# Allegro board Fb_Connect1_SYNC_Life-3.brd
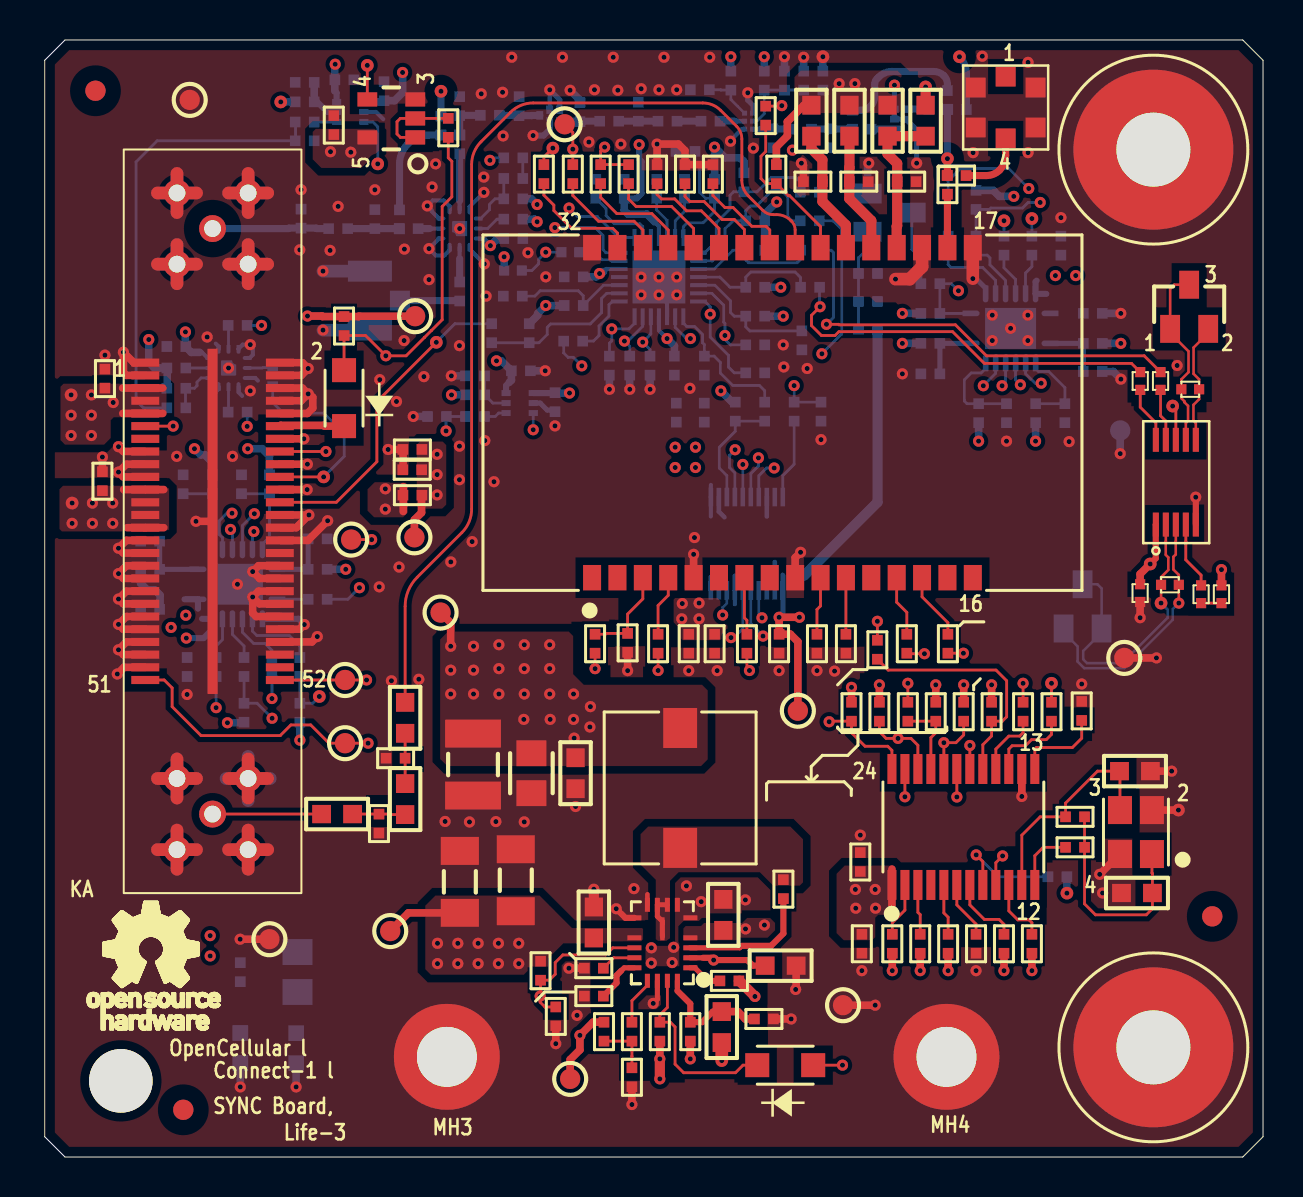
[diagram p0: board, top side]
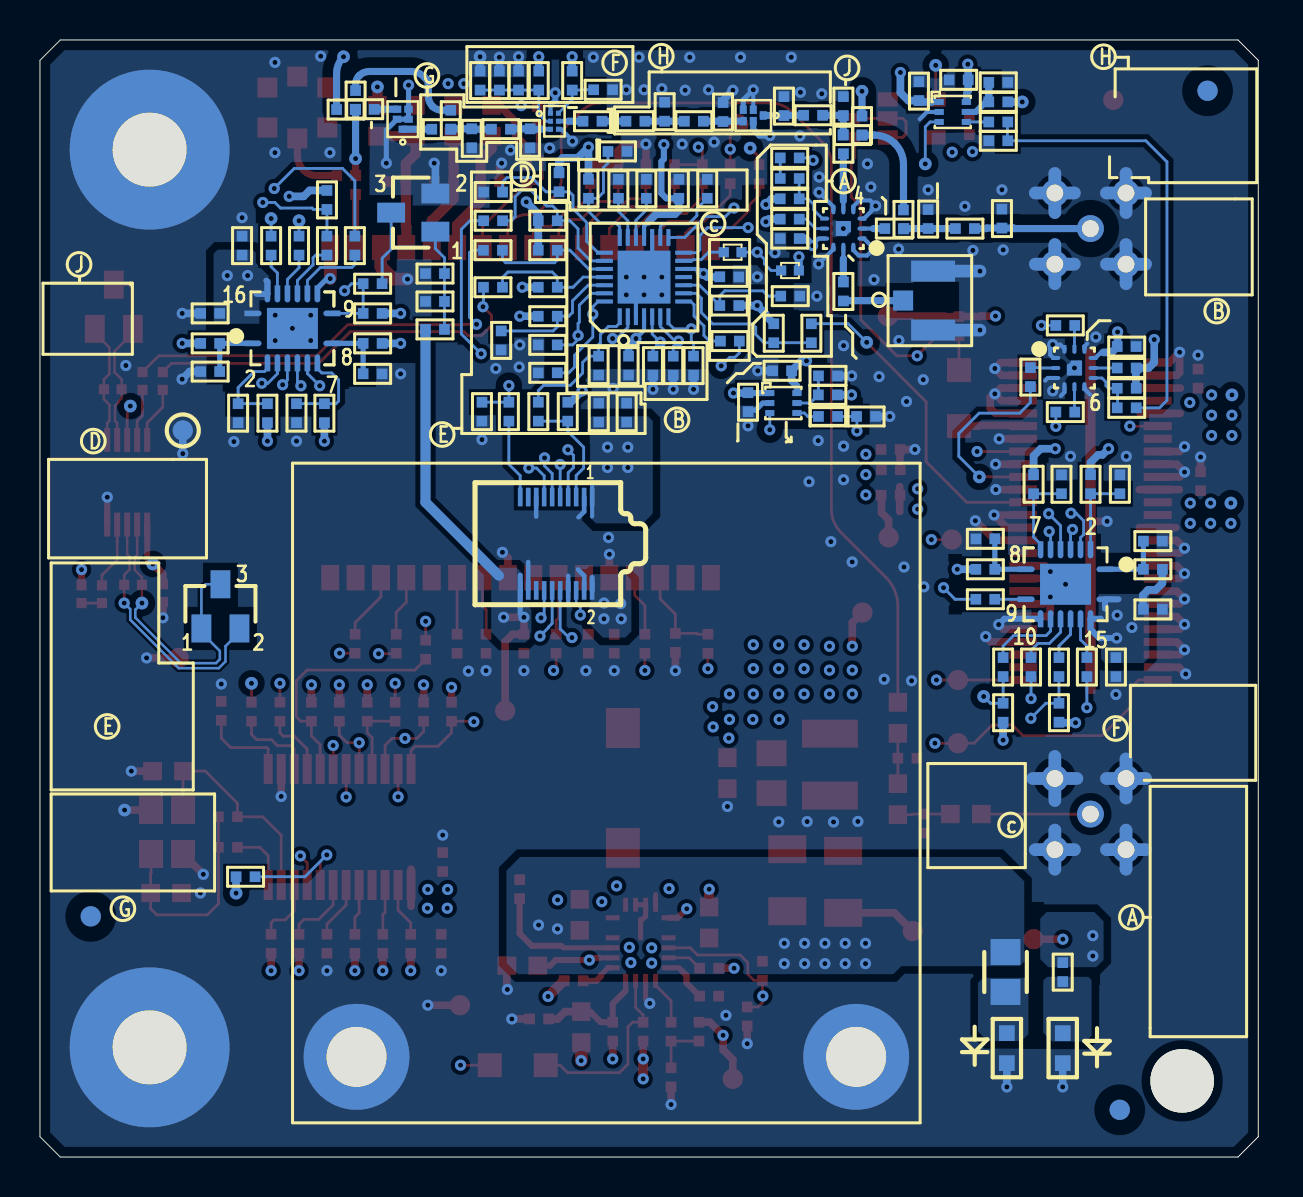
[diagram p1: board, bottom side, seen from below]

Outline 60.96 x 55.88 mm; copper layers: TOP, GND, SIG1, SIG2, PWR, BOTTOM. Coordinates in mm from the lower left corner of the outline.
Outline path: 0,54.86 0,1.02 1.02,0 59.94,0 60.96,1.02 60.96,54.86 59.94,55.88 1.02,55.88 0,54.86

## Design rules (mm)
net group ADT7481_D1_N: nets ADT7481_D1_N ADT7481_D1_P
net group ADT7481_D2_N: nets ADT7481_D2_N ADT7481_D2_P
net group ADT_THERM_N: nets ADT_THERM_N N16399039
net group TEMP_ALERT: nets TEMP_ALERT TEMP_ALERT_R
net group TIVA_SYNCCONN_I2C7_SCLK: nets N16399647 TIVA_SYNCCONN_I2C7_SCLK
net group TIVA_SYNCCONN_I2C7_SDA: nets N16399661 TIVA_SYNCCONN_I2C7_SDA
net group PWR: nets LT8640_INT_VCC N00529 N10833 N10845 N467382
net group RF: nets GPS_IRIDUM_ANT GPS_LNA_IN GPS_LNA_OUT N16236513 N16236561 N16236568 N16236755 N16239300 N16242234 N16242265 N16252104 N16252502 N16252658 N16252725 N16253717 N16281078 N16326389 N16509904 RF_IN_EXT_C RF_IN_IRIDUM RF_IN_LTE RF_IN_SPDT

## Placement (name value [footprint] x y rotation side)
C1L1  1UF  [CC0402]  40.89 10.67 270 top
C1L2  22pF  [CC0603]  54.55 19.3 0 top
C1L3  22pF  [CC0603]  54.65 13.21 180 top
C1L4  1UF  [CC0402]  32.22 25.68 270 top
C1L5  1UF  [CC0402]  31.61 37.24 90 bottom
C2  0.1uF  [CC0402]  38.44 48.79 180 top
C2L11  0.1UF  [SMC0402A]  54.81 27.77 180 top
C2L12  1000PF  [SMC0402A]  55.86 28.63 90 top
C2L13  1000PF  [SMC0402A]  56.87 38.41 90 top
C3  0.1uF  [CC0402]  40.73 48.79 0 top
C4  0.1uF  [CC0402]  43.13 48.79 0 top
C4N1  10pF  [RC0402]  12.83 46.95 270 bottom
C4N2  10pF  [RC0402]  16.52 46.92 270 bottom
C5  0.1uF  [CC0402]  40.81 14.76 90 top
C8  0.1uF  [CC0402]  38.64 25.68 270 top
C9  0.1uF  [CC0402]  41.2 44.2 0 bottom
C10  0.1uF  [CC0402]  36.75 25.68 270 top
C11  0.1uF  [CC0402]  50.85 45.59 90 bottom
C12  0.1uF  [CC0402]  33.52 25.68 270 top
C13  0.1uF  [CC0402]  52.44 42.2 0 bottom
C14  100uF  [CC1210]  21.43 19.63 270 top
C15  4.7UF  [CC0805]  24.35 19.2 270 top
C16  1uF  [CC0603]  26.56 19.2 270 top
C17  0.1uF  [CC0402]  7.12 24.51 270 bottom
C18  0.1uF  [CC0402]  5.28 27.39 180 bottom
C19  0.1uF  [CC0402]  36.96 13.4 90 top
C20  10uF  [CC1206]  23.57 13.85 90 top
C21  10uF  [CC1206]  20.77 13.76 90 top
C22  1uF  [CC0603]  33.95 12.11 90 top
C23  1uF  [CC0603]  27.48 11.73 90 top
C24  1uF  [CC0603]  36.82 9.57 0 top
C25  0.1uF  [CC0402]  27.48 8.05 180 top
C26  10pF  [CC0402]  32.3 6.27 270 top
C27  0.1uF  [CC0402]  33 37.24 90 bottom
C1944  0.1uF  [CC0402]  14.47 51.62 90 top
C2609  33pF  [C0402]  23.45 45.95 0 bottom
C3505  22pF  [C0402]  17.56 19.95 180 top
C4461  0.1uF  [C0402]  2.89 33.81 90 top
C4462  33pF  [C0402]  31.16 51.82 0 bottom
C4477  0.1uF  [C0402]  37.97 53.85 90 bottom
C4478  1uF  [C0402]  37.01 53.85 90 bottom
C4479  33pF  [C0402]  38.94 53.85 90 bottom
C4480  33pF  [C0402]  32.78 53.39 180 bottom
C4481  33pF  [C0402]  45.17 48.64 90 top
C4482  0.1uF  [C0402]  3.01 38.94 90 top
C4495  0.1uF  [C0402]  25.53 37.76 270 bottom
C4496  0.1uF  [C0402]  23.83 39.33 0 bottom
C4497  0.1uF  [C0402]  18.39 34.38 180 top
C4498  0.1uF  [CC0402]  31.51 39.59 270 bottom
C4499  0.1uF  [CC0402]  26.47 44.03 180 bottom
C4500  0.1uF  [CC0402]  28.99 48.44 90 bottom
C4501  22pF  [C0402]  16.73 16.68 270 top
C4502  33pF  [C0402]  6.58 40.54 180 bottom
C4503  0.1uF  [C0402]  16.98 53.32 90 bottom
C4504  0.1uF  [C0402]  14.99 53.89 0 bottom
D1  PMEG3010ER,115  [SODFL3517X110N_NXP_AEE]  14.98 37.96 90 top
D2  PMEG3010ER,115  [SODFL3517X110N_NXP_AEE]  37.05 4.59 0 top
D10114  LED  [LED_LTST-C190]  9.79 5.45 270 bottom
D10125  LED  [LED_LTST-C190]  12.58 5.45 270 bottom
FB1  120E / 2A  [RC0603]  38.36 51.84 270 top
FB2  120E / 2A  [RC0603]  40.27 51.84 270 top
FB3  120E / 2A  [RC0603]  42.17 51.84 270 top
FB4  120E / 2A  [RC0603]  44.08 51.84 270 top
J3  SS4-10-3.50-L-D-K-TR  [MODULE_IRIDIUM-9603]  35.13 30.68 180 bottom
J4  QMS-026-05.75-L-D-RF1  [QMS-026-05P75-L-D-RF1]  8.4 31.8 270 top
J5  U.FL-R-SMT-1  [UFL-R-SMT-1]  16.27 42.84 270 bottom
L1  3.3uH  [WURTH_744777910]  31.79 18.46 180 top
L4001  6.8nH  [L0402]  33.31 51.82 0 bottom
MH1  Mounting_Hole  [MTG370X800]  55.47 50.39 0 top
MH2  Mounting_Hole  [MTG370X800]  55.47 5.49 0 top
MH3  Mounting_Hole  [M2_SPACER]  20.12 5.01 0 top
MH4  Mounting_Hole  [M2_SPACER]  45.12 5.01 0 top
NOREF  -  [unnamed]  2.54 53.34 0 top
NOREF#2  -  [#2]  59.94 0 90 top
NOREF#3  -  [#2]  0 1.02 0 top
NOREF#4  -  [#2]  55.47 5.49 90 top
NOREF#5  -  [unnamed#2]  3.81 3.81 0 top
NOREF#6  -  [#2]  0 54.86 0 top
NOREF#7  -  [unnamed]  58.42 12.04 0 top
NOREF#8  -  [unnamed]  6.93 2.36 0 top
NOREF#9  -  [#2]  1.02 0 90 top
NOREF#10  -  [#2]  55.47 5.49 0 top
NOREF#11  -  [#2]  0 1.02 315 top
NOREF#12  -  [#2]  1.02 0 90 top
NOREF#13  -  [unnamed]  6.93 2.36 180 bottom
NOREF#14  -  [unnamed]  2.54 53.34 180 bottom
NOREF#15  -  [unnamed]  58.42 12.04 180 bottom
Q1  2N7002L  [SOT23]  42.28 47.24 90 bottom
Q2P1  MMBT3904  [SOT23]  51.93 27.55 180 bottom
Q3L1  MMBT3904  [SOT23]  57.26 42.53 0 top
R1  0  [RC0402]  38.3 43.51 180 bottom
R2  10K  [RC0402]  35.55 45.36 180 bottom
R2L2  0  [SMR0402A]  57.86 28.6 0 top
R2L6  10K  [SMR0402A]  58.88 28.6 0 top
R2L7  0  [SMR0402A]  54.82 39.27 0 top
R2L8  0  [SMR0402A]  55.83 39.27 0 top
R2L9  10K  [SMR0402A]  22.99 44.35 270 bottom
R2L10  0  [SMR0402A]  25.86 45.26 270 bottom
R3  10K  [RC0402]  35.55 46.84 180 bottom
R4  0  [RC0402]  38.29 46.84 0 bottom
R5  10K  [RC0402]  35.55 43.51 180 bottom
R6  0  [RC0402]  38.3 45.36 180 bottom
R7  0  [RC0402]  36.08 52.1 90 top
R11  10K  [RC0402]  26.47 42.6 0 bottom
R14  10K  [RC0402]  35.55 42.06 180 bottom
R15  0  [RC0402]  14.68 46.45 180 bottom
R16  10K  [RC0402]  30.64 49.17 90 top
R17  10K  [RC0402]  32.04 49.17 90 top
R18  10K  [RC0402]  33.43 49.17 90 top
R19  0  [R0603]  18.03 21.97 270 top
R20  10K  [RC0402]  36.61 49.17 270 top
R23  0  [RC0402]  43.19 22.28 90 top
R24  10K  [RC0402]  47.38 22.28 270 top
R26  121E  [R0402]  24.98 49.17 270 top
R27  121E  [R0402]  26.42 49.17 270 top
R28  10K  [RC0402]  40.37 22.28 270 top
R29  10K  [RC0402]  41.77 22.28 270 top
R30  10K  [RC0402]  44.58 22.28 270 top
R31  10K  [RC0402]  45.98 22.28 270 top
R32  0  [RC0402]  41.66 25.38 90 top
R33  0  [RC0402]  48.95 22.28 90 top
R34  0  [RC0402]  50.38 22.28 90 top
R35  10K  [RC0402]  51.89 22.32 90 top
R36  10K  [RC0402]  14.98 41.57 270 top
R37  0  [RC0402]  51.55 15.49 180 top
R38  845K  [RC0402]  51.55 17.02 0 top
R39  10K  [RC0402]  46.6 10.67 270 top
R40  10K  [RC0402]  48 10.67 90 top
R41  10K  [RC0402]  42.41 10.67 90 top
R42  10K  [RC0402]  43.81 10.67 90 top
R43  10K  [RC0402]  45.2 10.67 90 top
R44  10K  [RC0402]  49.39 10.67 90 top
R45  0  [RC0402]  43.14 25.68 90 top
R46  10K  [RC0402]  40.09 25.68 270 top
R47  10K  [RR0402]  29.17 25.72 90 top
R48  0  [RC0402]  30.69 25.68 90 top
R49  121E  [R0402]  35.14 25.68 90 top
R50  100K  [RC0402]  41.2 42.8 180 bottom
R51  1K  [RC0402]  41.2 41.4 180 bottom
R52  0  [RC0402]  44.31 43.69 0 bottom
R53  10K  [RC0402]  44.31 42.2 0 bottom
R54  10K  [RC0402]  44.31 40.7 0 bottom
R55  1K  [RC0402]  44.31 39.18 180 bottom
R56  0  [RC0402]  45.2 45.59 90 bottom
R57  10K  [RC0402]  46.73 37.21 90 bottom
R58  10K  [RC0402]  46.6 47.88 270 bottom
R59  0  [RC0402]  46.6 45.59 90 bottom
R60  1K  [RC0402]  48.12 37.21 270 bottom
R61  0  [RC0402]  48 45.59 90 bottom
R62  0  [RC0402]  49.39 45.59 90 bottom
R63  10K  [RC0402]  49.58 37.21 90 bottom
R64  1K  [RC0402]  51.05 37.21 270 bottom
R65  0  [RC0402]  13.66 27.9 180 bottom
R66  10K  [RC0402]  13.66 29.4 180 bottom
R67  1K  [RC0402]  13.66 30.93 0 bottom
R68  10K  [RC0402]  52.44 40.7 180 bottom
R69  1K  [RC0402]  52.44 39.29 0 bottom
R70  10K  [RC0402]  12.77 22.23 90 bottom
R71  0  [RC0402]  12.77 24.51 270 bottom
R72  1K  [RC0402]  9.85 33.66 90 bottom
R73  0  [RC0402]  11.37 24.51 270 bottom
R74  10K  [RC0402]  11.24 33.66 270 bottom
R75  10K  [RC0402]  9.97 22.23 90 bottom
R76  0  [RC0402]  9.97 24.51 270 bottom
R77  0  [RC0402]  8.58 24.51 270 bottom
R78  1K  [RC0402]  6.93 33.66 90 bottom
R79  10K  [RC0402]  8.39 33.66 270 bottom
R80  10K  [RC0402]  5.28 29.4 0 bottom
R81  1K  [RC0402]  5.28 30.81 180 bottom
R82  41.2K  [RC0402]  27.48 9.45 180 top
R83  100K  [RC0402]  24.81 9.32 90 top
R84  0  [RC0402]  34.26 8.81 0 top
R85  243K  [RC0402]  35.99 6.91 180 top
R86  12K  [RC0402]  25.57 7.03 90 top
R87  1M  [RC0603]  33.88 6.5 270 top
R88  10K  [RC0402]  27.98 6.27 270 top
R89  0  [RC0402]  29.38 6.27 90 top
R90  100K  [RC0402]  30.78 6.27 90 top
R91  10K  [RC0402]  29.38 3.99 270 top
R92  100K  [RC0402]  38.84 37.29 90 bottom
R93  0  [RC0402]  37.5 37.29 90 bottom
R94  10K  [RC0402]  34.55 37.29 270 bottom
R95  0  [RC0402]  36.02 37.29 90 bottom
R96  0  [RC0402]  20.19 51.49 270 top
R150  0E  [R0402]  19.83 51.6 90 bottom
R151  0E  [R0402]  45.64 52.4 0 bottom
R874  0E  [R0402]  18.21 46.45 0 bottom
R875  0E  [R0402]  17.75 46.9 270 bottom
R876  0E  [R0402]  23.74 52.57 270 bottom
R2610  100K  [R0402]  23.45 47.93 180 bottom
R2611  100K  [R0402]  23.45 46.92 180 bottom
R2612  1K  [R0402]  23.45 48.95 0 bottom
R10784  200  [R0402]  9.79 9.25 270 bottom
R10798  620E  [RC0805]  12.65 9.26 270 bottom
R10922  0E  [R0402]  20.76 50.66 270 bottom
R10923  0E  [R0402]  20.3 51.12 0 bottom
R10924  0E  [R0402]  22.27 52.11 0 bottom
R10925  0E  [R0402]  20.76 52.57 270 bottom
R10926  0E  [R0402]  28.24 51.82 0 bottom
R10927  0E  [R0402]  26.78 52.27 270 bottom
R10928  0E  [R0402]  29.7 52.29 270 bottom
R10930  0E  [R0402]  36 53.85 90 bottom
R10931  0E  [R0402]  34.33 53.85 90 bottom
R10932  0E  [R0402]  37.9 51.42 0 bottom
R10933  0E  [R0402]  36.44 50.96 90 bottom
R10934  0E  [R0402]  39.36 50.96 90 bottom
R10935  0E  [R0402]  40.88 51.42 0 bottom
R10936  0E  [R0402]  40.41 51.89 270 bottom
R10937  0E  [R0402]  44.71 52.42 0 bottom
R10938  0E  [R0402]  45.17 52.87 270 bottom
R10939  0E  [R0402]  20.76 43.3 270 bottom
R10940  0  [RC0402]  27.82 49.17 270 top
R10941  0  [RC0402]  29.21 49.17 270 top
R10942  0  [RC0402]  45.19 25.68 90 top
R10943  0  [RC0402]  27.54 25.68 90 top
R10944  0E  [R0402]  45.63 49.1 180 top
R10945  0E  [R0402]  23.45 49.98 180 bottom
R11114  3.3K  [R0402]  18.4 33.11 0 top
R11115  10K  [R0402]  18.4 35.39 0 top
R11191  0ohm  [R0402]  21.53 37.05 180 bottom
R11192  100K  [R0402]  19.63 37.05 180 bottom
R11194  10K  [R0402]  21.53 39.08 0 bottom
R11195  10K  [R0402]  21.54 38.13 180 bottom
R11196  10K  [RC0402]  38.29 48.27 0 bottom
R11197  10K  [RC0402]  32.06 50.3 180 bottom
R11198  10K  [RC0402]  32.02 48.44 90 bottom
R11199  10K  [RC0402]  30.62 48.44 90 bottom
R11200  10K  [RC0402]  27.57 48.44 90 bottom
R11205  10K  [RC0402]  35.55 40.63 0 bottom
R11206  10K  [RC0402]  35.55 39.23 0 bottom
R11207  10K  [RC0402]  33.01 39.59 270 bottom
R11208  100K  [R0402]  30.29 39.59 270 bottom
R11209  100K  [R0402]  29.27 39.59 270 bottom
R11210  100K  [R0402]  28.26 39.59 270 bottom
R11211  10K  [RC0402]  34.99 48.76 270 bottom
R11212  10K  [RC0402]  33.52 48.44 270 bottom
R11213  10K  [RC0402]  24.24 41.21 270 bottom
R11214  0  [RC0402]  22.36 41.21 90 bottom
R11215  0  [RC0402]  26.44 40.82 180 bottom
R11216  10K  [RC0402]  23.42 43.07 180 bottom
R11217  10K  [RC0402]  37.88 40.85 270 bottom
R11221  0  [R0603]  18.03 17.91 270 top
R11222  0  [R0603]  14.63 17.16 180 top
R11223  0E  [R0402]  9.66 41.6 0 bottom
R11224  100K  [R0402]  6.58 38.46 0 bottom
R11225  100K  [R0402]  6.58 39.47 0 bottom
R11226  0E  [R0402]  11.41 39.01 90 bottom
R11227  1K  [R0402]  6.58 37.48 180 bottom
R11228  0E  [R0402]  9.66 37.27 180 bottom
R11229  0ohm  [R0402]  13.01 51.78 180 bottom
R11230  100K  [R0402]  13.01 50.84 0 bottom
R11231  10K  [R0402]  13.01 52.78 180 bottom
R11232  10K  [R0402]  13.01 53.76 0 bottom
R11233  100K  [R0402]  50.67 14.02 180 bottom
TP1  ?  [TP_40C]  39.95 7.59 0 top
TP2  ?  [TP_40C]  7.26 52.88 0 top
TP3  ?  [TP_40C]  15.03 23.86 0 top
TP4  ?  [TP_40C]  26.02 51.66 0 top
TP5  ?  [TP_40C]  18.53 42.06 0 top
TP6  ?  [TP_40C]  15.03 20.7 0 top
TP7  ?  [TP_40C]  17.29 11.3 0 top
TP8  ?  [TP_40C]  11.24 10.9 0 top
TP9  ?  [TP_40C]  15.33 30.89 0 top
TP10  ?  [TP_40C]  37.69 22.33 0 top
TP11  ?  [TP_40C]  19.81 27.24 0 top
TP12  ?  [TP_40C]  54.02 24.97 0 top
TP13  ?  [TP_40C]  26.29 3.91 0 top
TP14  ?  [TP_40C]  53.81 36.35 180 bottom
TP3026  T POINT R  [TP_40C]  18.5 31 180 top
U2  XR20M1170  [TSSOP65P640X120-24N]  45.97 16.51 90 top
U3  LTE-Lite  [MODULE_LTE-LITE]  36.91 37.24 90 top
U3A1  ADT7481  [SSOP10_5MM]  56.6 33.76 90 top
U4  SN74AVC4T774RGYR  [VQFN50P400X350X100-17N_TI]  48.33 41.45 180 bottom
U5  SN74AVC4T774RGYR  [VQFN50P400X350X100-17N_TI]  9.64 28.65 0 bottom
U6  LT8640EUDC  [QFN50P300X400X80-20N]  30.91 10.72 270 top
U19  74LVC1G125GV,125  [SOT23_5]  17.34 51.96 90 top
U28  SX1509B  [QFN29_0P4_4X4]  30.73 44.02 90 bottom
U2604  SKY13330-397LF  [QFN50P200X200X65-13N_AEE]  20.76 46.45 0 bottom
U2605  857139  [FIL_857139]  25.27 52.1 0 bottom
U2606  BGA824N6  [TSNP-6-2]  35.22 51.82 0 bottom
U2607  857140  [FIL_857140]  42.81 51.92 90 bottom
U7122  MM8430-2610  [SMA_MM8430-2610]  48.08 52.5 270 top
U7153  -  [SN74AVC1T45DRLR]  23.76 37.72 270 bottom
U7154  SKY13330-397LF  [QFN50P200X200X65-13N_AEE]  9.2 39.47 180 bottom
U7155  -  [SN74AVC1T45DRLR]  15.29 52.28 270 bottom
X1  ABM8G-14.7456MHZ  [XTAL_NX3225GA]  54.6 16.26 90 top

## Library data of the parts
C1L1-C1L5 C2L12 C2L13 = CAPN#1: signal model: CAPACITOR20PF
C2-C5 C8-C13 C17-C19 C25 C27 C1944 C4498-C4500 = CAP_CER_0.1UF_10V_10%_X5R_0402
C2L11 = CAPN#4: signal model: CAPACITOR20PF
C4N1 C4N2 = CAPN#2: signal model: CAPACITOR20PF
C14-C16 C20-C24 C26 = CAP-NP_1
C2609 C4462 C4479-C4481 C4502 = CAP_CER_33pF_50V_5%_X7R_0402
C3505 C4501 = CAP_CER_22UF_1210_25V
C4461 C4482 = CAP CER 0.1UF 25V 10% X7R 0402
C4477 C4495-C4497 C4503 C4504 = CAP_CER_0.1uF_0402_25V
C4478 = CAP_CER_1UF_16V_10%_X6S_0402
D1 D2 = DIODE_SCHOTTKY_30V_0.2A SOD523
D10114 D10125 = LED_wp117
FB1-FB4 = FB_1
J3 = eJTAG Header_3
J4 = QMS-026-05.75-L-D-RF1
J5 = U.FL-R-SMT-1
L1 = INDUCTOR_2.8uH
L4001 = INDUCTOR_6.8nH_300mA_0402
MH1-MH4 = Mounting_Hole_0
Q1 = 2N7002L_1
Q2P1 Q3L1 = NPN#1
R1 R4 R6 R7 R15 R19 R23 R32-R34 R37 R45 R48 R93 R95 R96 R10940-R10943 R11214 R11221 R11222 = RES_0.0_OHM_1/16W_0402_SMD
R2 R3 R5 R11 R14 R16-R18 R20 R24 R28-R31 R35 R36 R38-R44 R46 R47 R51 R53-R55 R57 R58 R60 R63 R64 R66-R70 R72 R74 R75 R78-R82 R85 R87 R88 R91 R92 R94 R10798 R11196-R11200 R11205-R11207 R11211-R11213 R11216 R11217 = R_1
R2L2 R2L7 R2L8 R2L10 = RESN#1: signal model: RESISTOR50
R2L6 R2L9 = RESN: signal model: RESISTOR50
R26 R27 R49 = RES_0ohm_0402_0.1W
R50 = 100K-1/16W-5%-0603_0
R52 R56 R59 R61 R62 R65 R71 R73 R76 R77 R83 R84 R86 R89 R90 R11215 = RES_1.0_OHM_1/16W_0402_SMD
R150 R151 R874-R876 R10922-R10928 R10930-R10939 R10944 R10945 R11223 R11226 R11228 = RES_0ohm_0402_63mW
R2610 R2611 R11224 R11225 = RES_100K_0402_63mW
R2612 R11227 = RES_1K_0402_63mW
R10784 = RES_100K_1/16W_5%_0402_SMD_1
R11114 = RES_3.3K_0402_63mW
R11115 R11194 R11195 R11231 R11232 = RES_10K_0402_63mW
R11191 R11229 = RESISTOR_0ohm_0402_100mw
R11192 R11208-R11210 R11230 R11233 = RES SMD 100K OHM 1% 1/16W 0402
TP1-TP14 = T_POINT1#1
TP3026 = T POINT R
U2 = XR20M1170_0
U3 = LTE-Lite_0
U3A1 = ADT7481
U4 U5 = SN74AVC4T774RGYR_2
U6 = LT8610EMSE-EMSE16_0
U19 = NL17SZ126_1
U28 = SX1509B_1
U2604 U7154 = SKY13330-397LF
U2605 = 857139
U2606 = BGA824N6
U2607 = 857140
U7122 = MM8430-2610
U7153 U7155 = SN74AVC1T45DRLR
X1 = XTAL_4P_1

## Footprints (pads in the part's own frame, mm; a bottom-side part is the same pattern mirrored in y, then rotated)
C0402
  rect 0.533x0.533 smd: 1(-0.475,0) 2(0.475,0)
CC0402
  rect 0.533x0.533 smd: 1(-0.475,0) 2(0.475,0)
CC0603
  rect 0.94x0.914 smd: 1(-0.775,0) 2(0.775,0)
CC0805
  rect 1.295x1.499 smd: 1(-1,0) 2(1,0)
CC1206
  rect 1.397x1.905 smd: 1(-1.55,0) 2(1.55,0)
CC1210
  rect 1.397x2.794 smd: 1(-1.55,0) 2(1.55,0)
FIL_857139
  rect 0.35x0.425 smd: 1(-0.5,0) 2(0,-0.288) 3(0.5,-0.288) 4(0.5,0.288) 5(0,0.288)
FIL_857140
  rect 0.35x0.425 smd: 1(-0.5,0) 2(0,-0.288) 3(0.5,-0.288) 4(0.5,0.288) 5(0,0.288)
L0402
  rect 0.533x0.533 smd: 1(-0.475,0) 2(0.475,0)
LED_LTST-C190
  rect 0.787x0.787 smd: A(-0.75,0) K(0.75,0)
M2_SPACER
  round 5.3 hole 3: 1(0,0)
MODULE_IRIDIUM-9603
  rect 0.23x0.93 smd: 1(1.8,2.335) 2(1.8,-2.335) 3(1.4,2.335) 4(1.4,-2.335) 5(1,2.335) 6(1,-2.335) 7(0.6,2.335) 8(0.6,-2.335) 9(0.2,2.335) 10(0.2,-2.335) 11(-0.2,2.335) 12(-0.2,-2.335) 13(-0.6,2.335) 14(-0.6,-2.335) 15(-1,2.335) 16(-1,-2.335) 17(-1.4,2.335) 18(-1.4,-2.335) 19(-1.8,2.335) 20(-1.8,-2.335)
MODULE_LTE-LITE
  rect 1.27x0.9 smd: 1(-8.255,9.525) 2(-8.255,8.255) 3(-8.255,6.985) 4(-8.255,5.715) 5(-8.255,4.445) 6(-8.255,3.175) 7(-8.255,1.905) 8(-8.255,0.635) 9(-8.255,-0.635) 10(-8.255,-1.905) 11(-8.255,-3.175) 12(-8.255,-4.445) 13(-8.255,-5.715) 14(-8.255,-6.985) 15(-8.255,-8.255) 16(-8.255,-9.525) 17(8.255,-9.525) 18(8.255,-8.255) 19(8.255,-6.985) 20(8.255,-5.715) 21(8.255,-4.445) 22(8.255,-3.175) 23(8.255,-1.905) 24(8.255,-0.635) 25(8.255,0.635) 26(8.255,1.905) 27(8.255,3.175) 28(8.255,4.445) 29(8.255,5.715) 30(8.255,6.985) 31(8.255,8.255) 32(8.255,9.525)
MTG370X800
  round 8 hole 3.7: 1(0,0)
QFN29_0P4_4X4
  rect 0.838x0.203 smd: 1(-1.981,1.219) 2(-1.981,0.813) 3(-1.981,0.406) 4(-1.981,0) 5(-1.981,-0.406) 6(-1.981,-0.813) 7(-1.981,-1.219) 15(1.981,-1.219) 16(1.981,-0.813) 17(1.981,-0.406) 18(1.981,0) 19(1.981,0.406) 20(1.981,0.813) 21(1.981,1.219)
  rect 0.203x0.838 smd: 8(-1.219,-1.981) 9(-0.813,-1.981) 10(-0.406,-1.981) 11(0,-1.981) 12(0.406,-1.981) 13(0.813,-1.981) 14(1.219,-1.981) 22(1.219,1.981) 23(0.813,1.981) 24(0.406,1.981) 25(0,1.981) 26(-0.406,1.981) 27(-0.813,1.981) 28(-1.219,1.981)
  rect 2.642x2.642 smd: 29(0,0)
QFN50P200X200X65-13N_AEE
  custom 0.44x0.2 smd: 1(-0.93,0.5) 2(-0.93,0) 3(-0.93,-0.5) 7(0.93,-0.5) 8(0.93,0) 9(0.93,0.5)
  custom 0.2x0.44 smd: 4(-0.5,-0.93) 5(0,-0.93) 6(0.5,-0.93) 10(0.5,0.93) 11(0,0.93) 12(-0.5,0.93)
  custom 0.76x0.76 smd: 13(0,0)
QFN50P300X400X80-20N
  rect 0.25x0.7 smd: 1(1.25,1.4) 2(0.75,1.4) 3(0.25,1.4) 4(-0.25,1.4) 6(-1.25,1.4) 11(-1.25,-1.4) 13(-0.25,-1.4) 14(0.25,-1.4) 15(0.75,-1.4) 16(1.25,-1.4)
  rect 0.7x0.25 smd: 7(-1.9,0.75) 8(-1.9,0.25) 9(-1.9,-0.25) 10(-1.9,-0.75) 17(1.9,-0.75) 18(1.9,-0.25) 19(1.9,0.25) 20(1.9,0.75)
  rect 0.4x0.22 smd: 21(-1.075,0)
  rect 0.36x0.22 smd: 22(-0.305,0)
QMS-026-05P75-L-D-RF1
  rect 0.406x1.397 smd: 1(-7.938,-3.365) 2(-7.938,3.365) 3(-7.303,-3.365) 4(-7.303,3.365) 5(-6.668,-3.365) 6(-6.668,3.365) 7(-6.032,-3.365) 8(-6.032,3.365) 9(-5.397,-3.365) 10(-5.397,3.365) 11(-4.763,-3.365) 12(-4.763,3.365) 13(-4.128,-3.365) 14(-4.128,3.365) 15(-3.493,-3.365) 16(-3.493,3.365) 17(-2.857,-3.365) 18(-2.857,3.365) 19(-2.223,-3.365) 20(-2.223,3.365) 21(-1.587,-3.365) 22(-1.587,3.365) 23(-0.953,-3.365) 24(-0.953,3.365) 25(-0.318,-3.365) 26(-0.318,3.365) 27(0.318,-3.365) 28(0.318,3.365) 29(0.953,-3.365) 30(0.953,3.365) 31(1.587,-3.365) 32(1.587,3.365) 33(2.223,-3.365) 34(2.223,3.365) 35(2.857,-3.365) 36(2.857,3.365) 37(3.493,-3.365) 38(3.493,3.365) 39(4.128,-3.365) 40(4.128,3.365) 41(4.763,-3.365) 42(4.763,3.365) 43(5.397,-3.365) 44(5.397,3.365) 45(6.032,-3.365) 46(6.032,3.365) 47(6.668,-3.365) 48(6.668,3.365) 49(7.303,-3.365) 50(7.303,3.365) 51(7.938,-3.365) 52(7.938,3.365)
  rect 17.272x0.508 smd: 53(0,0)
  round 1.346 hole 0.838: 54(-16.425,1.78) 55(-12.865,1.78) 56(-14.645,0) 57(-16.425,-1.78) 58(-12.865,-1.78) 59(12.865,1.78) 60(16.425,1.78) 61(14.645,0) 62(12.865,-1.78) 63(16.425,-1.78)
R0402
  rect 0.533x0.533 smd: 1(-0.475,0) 2(0.475,0)
R0603
  rect 0.94x0.914 smd: 1(-0.775,0) 2(0.775,0)
RC0402
  rect 0.533x0.533 smd: 1(-0.475,0) 2(0.475,0)
RC0603
  rect 0.94x0.914 smd: 1(-0.775,0) 2(0.775,0)
RC0805
  rect 1.295x1.499 smd: 1(-1,0) 2(1,0)
RR0402
  rect 0.533x0.533 smd: 1(-0.475,0) 2(0.475,0)
SMA_MM8430-2610
  rect 1x1 smd: 1(-1.55,0) 2(-1,-1.5) 3(1,-1.5) 4(1.55,0) 5(1,1.5) 6(-1,1.5)
SMC0402A
  rect 0.508x0.508 smd: 1(0,0) 2(0,-0.889)
SMR0402A
  rect 0.508x0.508 smd: 1(0,0) 2(0,-0.889)
SN74AVC1T45DRLR
  rect 0.3x0.46 smd: 1(-0.5,-0.68) 2(0,-0.68) 3(0.5,-0.68) 4(0.5,0.68) 5(0,0.68) 6(-0.5,0.68)
SODFL3517X110N_NXP_AEE
  rect 1.2x1.2 smd: A(1.4,0) K(-1.4,0)
SOT23
  rect 0.991x1.397 smd: 1(-0.953,-1.105) 2(0.953,-1.105) 3(0,1.105)
SOT23_5
  rect 0.711x0.991 smd: 1(-0.95,-1.2) 2(0,-1.2) 3(0.95,-1.2) 4(0.95,1.2) 5(-0.95,1.2)
SSOP10_5MM
  rect 1.2x0.305 smd: 1(-2.12,1) 2(-2.12,0.5) 3(-2.12,0) 4(-2.12,-0.5) 5(-2.12,-1) 6(2.12,-1) 7(2.12,-0.5) 8(2.12,0) 9(2.12,0.5) 10(2.12,1)
TP_40C
  round 1.016 smd: 1(0,0)
TSNP-6-2
  rect 0.25x0.25 smd: 1(0.2,-0.4) 2(0.2,0) 3(0.2,0.4) 4(-0.2,0.4) 5(-0.2,0) 6(-0.2,-0.4)
TSSOP65P640X120-24N
  rect 1.5x0.45 smd: 1(-2.9,3.575) 2(-2.9,2.925) 3(-2.9,2.275) 4(-2.9,1.625) 5(-2.9,0.975) 6(-2.9,0.325) 7(-2.9,-0.325) 8(-2.9,-0.975) 9(-2.9,-1.625) 10(-2.9,-2.275) 11(-2.9,-2.925) 12(-2.9,-3.575) 13(2.9,-3.575) 14(2.9,-2.925) 15(2.9,-2.275) 16(2.9,-1.625) 17(2.9,-0.975) 18(2.9,-0.325) 19(2.9,0.325) 20(2.9,0.975) 21(2.9,1.625) 22(2.9,2.275) 23(2.9,2.925) 24(2.9,3.575)
UFL-R-SMT-1
  rect 1x1 smd: 1(0,-1.5)
  rect 1.05x2.2 smd: 2(-1.475,0) 3(1.475,0)
unnamed
  round 1.016 smd: (0,0)
unnamed#2
  round 3.175 hole 3.175 unplated: (0,0)
VQFN50P400X350X100-17N_TI
  custom 0.85x0.28 smd: 1(-1.975,-0.75) 8(1.975,-0.75) 9(1.975,0.75) 16(-1.975,0.75)
  custom 0.28x0.85 smd: 2(-1.25,-1.725) 3(-0.75,-1.725) 4(-0.25,-1.725) 5(0.25,-1.725) 6(0.75,-1.725) 7(1.25,-1.725) 10(1.25,1.725) 11(0.75,1.725) 12(0.25,1.725) 13(-0.25,1.725) 14(-0.75,1.725) 15(-1.25,1.725)
  rect 2.55x2.05 smd: 17(0,0)
WURTH_744777910
  rect 1.7x2 smd: 1(0,3) 2(0,-3)
XTAL_NX3225GA
  rect 1.4x1.2 smd: 1(-1.1,-0.8) 2(1.1,-0.8) 3(1.1,0.8) 4(-1.1,0.8)

## Nets
3.3VD_TIVA: C1L1.1(A[0]) C2L11.2(A[0]) C5.1(A[0]) C11.1(A[0]) C13.1(A[0]) C17.1(A[0]) C18.1(A[0]) C1944.1(A[0]) C2609.1 C4461.1 C4495.1 C4498.1(A[0]) C4499.1(A[0]) C4500.1(A[0]) C4502.1 C4503.1 FB1.1 FB2.1 FB3.1 J4.21 J4.23 J4.25 J4.27 R2.1(A[0]) R2L6.1(A[0]) R2L9.1(A[0]) R3.1(A[0]) R5.1(A[0]) R11.1(A[0]) R14.1(A[0]) R20.1(A[0]) R24.1(A[0]) R28.1(A[0]) R29.1(A[0]) R30.1(A[0]) R31.1(A[0]) R36.1(A[0]) R40.1(A[0]) R41.1(A[0]) R42.1(A[0]) R43.1(A[0]) R44.1(A[0]) R53.1(A[0]) R54.1(A[0]) R57.1(A[0]) R58.1(A[0]) R63.1(A[0]) R66.1(A[0]) R68.1(A[0]) R70.1(A[0]) R74.1(A[0]) R75.1(A[0]) R79.1(A[0]) R80.1(A[0]) R90.1(A[0]) R10784.1(A[0]) R10930.2 R10931.2 R11114.1 R11195.2 R11211.1(A[0]) R11212.1(A[0]) R11213.1(A[0]) R11231.2 R11233.1 TP5.1(A) U2.1(VCC) U3A1.1(VDD) U4.15(VCCB) U4.16(VCCA) U5.15(VCCB) U5.16(VCCA) U19.5(VCC) U28.4(VCC1) U28.12(VDDM) U28.18(VCC2) U2604.9(VCC) U7153.1(VCCA) U7154.9(VCC) U7155.1(VCCA)
12V_IN: C20.1(A[0]) C21.1(A[0]) C22.1(A[0]) C23.1(A[0]) C4482.1 J4.5 J4.7 J4.9 R83.2(B[0]) R10798.1(A[0]) TP7.1(A) U6.4(VIN1) U6.13(VIN2)
12V_REG_ENB: R11215.1(A[0]) U28.8(I/O[7])
GND: C1L1.2(B[0]) C1L2.2(B[0]) C1L3.2(B[0]) C1L4.2(B[0]) C1L5.2(B[0]) C2.2(B[0]) C2L11.1(B[0]) C3.2(B[0]) C4.2(B[0]) C4N1.1(A[0]) C4N2.1(A[0]) C5.2(B[0]) C8.2(B[0]) C9.2(B[0]) C10.2(B[0]) C11.2(B[0]) C12.2(B[0]) C13.2(B[0]) C14.2(B[0]) C15.2(B[0]) C16.2(B[0]) C17.2(B[0]) C18.2(B[0]) C20.2(B[0]) C21.2(B[0]) C22.2(B[0]) C23.2(B[0]) C24.2(B[0]) C25.2(B[0]) C27.2(B[0]) C1944.2(B[0]) C2609.2 C3505.2 C4461.2 C4477.2 C4478.2 C4479.2 C4480.2 C4482.2 C4495.2 C4496.2 C4497.2 C4498.2(B[0]) C4499.2(B[0]) C4500.2(B[0]) C4501.2 C4502.2 C4503.2 C4504.2 D10114.K D10125.K J3.3 J3.4 J3.8 J3.15 J3.18 J4.1 J4.2 J4.3 J4.4 J4.6 J4.8 J4.10 J4.14 J4.15 J4.17 J4.18 J4.19 J4.22 J4.26 J4.28 J4.29 J4.30 J4.31 J4.32 J4.33 J4.34 J4.35 J4.36 J4.37 J4.38 J4.39 J4.40 J4.41 J4.42 J4.43 J4.44 J4.45 J4.46 J4.47 J4.48 J4.49 J4.53 J4.54 J4.55 J4.57 J4.58 J4.59 J4.60 J4.62 J4.63 J5.2 J5.3 MH1.1 MH2.1 MH3.1 MH4.1 Q1.2(S) R16.2(B[0]) R17.2(B[0]) R18.2(B[0]) R35.2(B[0]) R39.2(B[0]) R46.2(B[0]) R47.1(A[0]) R50.1(A[0]) R55.2(B[0]) R60.2(B[0]) R64.2(B[0]) R67.2(B[0]) R69.2(B[0]) R72.2(B[0]) R78.2(B[0]) R81.2(B[0]) R82.2(B[0]) R85.1(A[0]) R86.1(A[0]) R91.2(B[0]) R92.1(A[0]) R876.1 R10925.1 R10927.1 R10928.1 R10933.1 R10934.1 R11115.1 R11192.2 R11194.1 R11196.2(B[0]) R11197.2(B[0]) R11198.2(B[0]) R11199.2(B[0]) R11200.2(B[0]) R11205.2(B[0]) R11206.2(B[0]) R11207.2(B[0]) R11208.2 R11209.2 R11210.2 R11216.2(B[0]) R11217.2(B[0]) R11230.2 R11232.1 TP1.1(A) TP2.1(A) TP8.1(A) TP12.1(A) TP14.1(A) U2.14(GND) U3.5(GND1) U3.9(GND2) U3.17(GND3) U3.19(GND4) U3.32(GND5) U3A1.5(GND) U4.10(GND) U4.17(PAD) U5.10(GND) U5.17(PAD) U6.6(GND1) U6.7(GND2) U6.10(GND3) U6.11(GND4) U6.18(GND) U19.3(GND) U28.3(GND1) U28.17(GND2) U28.29(TP) U2604.1(GND_1) U2604.3(GND_2) U2604.4(GND_3) U2604.6(GND_4) U2604.10(GND_5) U2604.12(GND_6) U2604.13(PAD) U2605.2(GND1) U2605.3(GND2) U2605.5(GND3) U2606.1(GND) U2606.4(GNDRF) U2607.2(GND_1) U2607.3(GND2) U2607.5(GND3) U7122.2(GND1) U7122.3(GND2) U7122.5(GND3) U7122.6(GND4) U7153.2(GND) U7154.1(GND_1) U7154.3(GND_2) U7154.4(GND_3) U7154.6(GND_4) U7154.10(GND_5) U7154.12(GND_6) U7154.13(PAD) U7155.2(GND) X1.2 X1.4
V2P5: C4496.1 C4497.1 C4504.1 R2610.1 R2611.1 R11114.2 R11115.2 R11224.1 R11225.1 TP3026.1(TP) U7153.6(VCCB) U7155.6(VCCB)
V5_A: C1L4.1(A[0]) C1L5.1(A[0]) C12.1(A[0]) C14.1(A[0]) C15.1(A[0]) C16.1(A[0]) C26.2(B[0]) C27.1(A[0]) FB4.1 J3.1 J3.2 L1.2(INB) R84.2(B[0]) R87.2(B[0]) R94.1(A[0]) TP11.1(A)
ADT7481_D1_N: C2L12.2(B[0]) Q2P1.2(E) U3A1.3(D1_M)
ADT7481_D1_P: C2L12.1(A[0]) Q2P1.1(B) Q2P1.3(C) U3A1.2(D1_P)
ADT7481_D2_N: C2L13.2(B[0]) Q3L1.2(E) U3A1.6(D2_M)
ADT7481_D2_P: C2L13.1(A[0]) Q3L1.1(B) Q3L1.3(C) U3A1.7(D2_P)
ADT_THERM_N: R2L2.1(A[0]) U3A1.4(THERM_N)
ALARM_IOEXP: R26.2 U3.31(ALARM)
BUFFER_LTE_RESET: R7.2(B[0]) U19.4(OUTY)
DF_ CTS: J3.11 U4.5(A3)
DF_ DCD: J3.9 U5.6(A4)
DF_ DSR: J3.10 U5.4(A2)
DF_ DTR: J3.14 U5.3(A1)
DF_ RTS: J3.13 U4.6(A4)
DF_RI: J3.12 U5.5(A3)
DF_S_RX: J3.7 U4.4(A2)
DF_S_TX: J3.6 U4.3(A1)
GPS_IRIDUM_ANT: C4N1.2(B[0]) J4.56 R15.2(B[0])
GPS_LNA_IN: C4462.1 R10926.2 R10928.2
GPS_LNA_OUT: R10932.1 R10933.2 U2606.3(AO)
INIT_SURVEY_SEL: R10943.1(A[0]) U28.15(I/O[10])
IO_RESET: R3.2(B[0]) R4.1(A[0]) U28.23(NRESET)
IOEXP_SCL: R1.2(B[0]) R5.2(B[0]) U28.25(SCL)
IOEXP_SDA: R2.2(B[0]) R6.2(B[0]) U28.24(SDA)
IRIDIUM_3.3VD: C10.1(A[0]) J3.20 R51.1(A[0]) TP10.1(A)
IRIDIUM_RESET: J3.5 R94.2(B[0]) R95.1(A[0])
IRIDIUM_RSTIOEXP: R95.2(B[0]) R11207.1(A[0]) U28.1(I/O[2])
IRQ_INTRPT: R24.2(B[0]) R32.1(A[0]) U2.17(IRQ#)
ISO_DF_ CTS: R29.2(B[0]) R58.2(B[0]) R59.2(B[0]) U2.22(CTS#)
ISO_DF_ DCD: R70.2(B[0]) R71.2(B[0]) U2.23(GPIO6/CD#)
ISO_DF_ DSR: R31.2(B[0]) R75.2(B[0]) R76.2(B[0]) U2.20(GPIO4/DSR#)
ISO_DF_ DTR: R77.2(B[0]) U2.19(GPIO5/DTR#)
ISO_DF_ RTS: R56.2(B[0]) U2.18(RTS#)
ISO_DF_RI: R28.2(B[0]) R73.2(B[0]) U2.24(GPIO7/RI#)
ISO_DF_S_RX: R61.2(B[0]) R11233.2 U2.8(RX)
ISO_DF_S_TX: R62.2(B[0]) U2.9(TX)
ISO_ENABLE: R52.2(B[0]) R53.2(B[0]) R65.1(A[0]) U4.9(NOE)
LOCK_OK_IOEXP: R27.2 U3.30(LOCK-OK)
LT8640_INT_VCC: C24.1(A[0]) R88.1(A[0]) TP13.1(A) U6.2(INTVCC)
LTE_1_PPS_OUT: R48.2(B[0]) U3.4(1PPS-OUT)
LTE_REF_OUT_40MHZ: R19.1(A[0]) U3.24(CLOCKOUT/ISP#)
LTE_RESET: D1.A D2.A R4.2(B[0]) R23.2(B[0]) R36.2(B[0]) R96.2(B[0])
LTE_TXD_GPS: R45.2(B[0]) U3.13(TXD_GPS)
NW_AVAIL: J3.19 R93.1(A[0])
PHASE_LOCK_IOEXP: R49.2 U3.7(PHASE_LOCK)
R_ALARM_IOEXP: R26.1 R11210.1 U28.7(I/O[6])
R_IRQ_INTRPT: J4.16 R32.2(B[0])
R_LOCK_OK_IOEXP: R27.1 R11209.1 TP4.1(A) U28.6(I/O[5])
R_LTE_1_PPS_OUT: J4.11 R48.1(A[0]) TP9.1(A)
R_LTE_REF_OUT_40MHZ: J4.61 R11222.2(B[0])
R_LTE_RESET: R7.1(A[0]) R20.2(B[0]) U3.23(R\E\S\E\T\)
R_LTE_TXD_CPU: R10942.1(A[0]) R11228.1
R_LTE_TXD_GPS: R45.1(A[0]) R11223.2
R_LTE_TXD_GPS_CPU: J4.20 R11226.1
R_NW_AVAIL: R92.2(B[0]) R93.2(B[0]) U28.2(I/O[3])
R_PHASE_LOCK_IOEXP: R49.1 R11208.1 U28.5(I/O[4])
RF_IN_EXT_C: C4481.1 U3.18(RF-IN)
RF_IN_IRIDUM: J5.1 R10939.2
RF_IN_LTE: C4481.2 R151.1 R10937.2 R10938.2 R10944.2
RF_IN_SPDT: C4N2.2(B[0]) R15.1(A[0]) R874.1 R875.2
SPDT_CNTRL: R10945.2 R11191.2 R11192.1
SPDT_CNTRL_IN: R2612.2 R10945.1
SPDT_CNTRL_LTE_CPU_GPS: R11227.2 R11229.2 R11230.1
SPDT_CNTRL_LTE_CPU_GPS_LVL: U28.14(I/O[9]) U7155.3(A)
SPDT_CNTRL_LVL: R11205.1(A[0]) U28.27(I/O[0]) U7153.3(A)
SURVEY_ACTIVE: R10940.2(B[0]) U3.29(SURVEY_ACTIVE)
SYNC_INT#: J4.24 R11214.2(B[0])
TEMP_ALERT: R2L10.2(B[0]) U28.13(I/O[8])
TEMP_ALERT_R: R2L9.2(B[0]) R2L10.1(A[0]) U3A1.8(ALERT_N_THERM2_N)
TIVA_SYNCCONN_I2C7_SCLK: J4.52 R1.1(A[0]) R2L7.1(A[0]) R33.2(B[0]) TP3.1(A)
TIVA_SYNCCONN_I2C7_SDA: J4.51 R2L8.1(A[0]) R6.1(A[0]) R34.2(B[0]) TP6.1(A)
WARMUP_SURVEY_INIT_SEL: R10940.1(A[0]) R10941.1(A[0]) R11206.1(A[0]) U28.28(I/O[1])
WARMUP_TRAINING: R10941.2(B[0]) U3.28(WARMUP_TRAINING)
N00529: C4.1(A[0]) FB3.2 FB4.2 U3.20(VANT)
N00638: R16.1(A[0]) U3.27(FREQ_SEL2)
N00642: R17.1(A[0]) U3.26(FREQ_SEL1)
N00646: R18.1(A[0]) U3.25(FREQ_SEL0)
N10833: C2.1(A[0]) FB1.2 U3.22(+3.3VB)
N10845: C3.1(A[0]) FB2.2 U3.21(+3.3VA)
N13151: C8.1(A[0]) U3.10(+3.0V OUT)
N354397: R47.2(B[0]) R10943.2(B[0]) U3.3(I\N\I\T\_\S\U\R\V\E\Y\)
N356446: R46.1(A[0]) U3.11(NMEA_1HZ/5HZ)
N467242: R88.2(B[0]) R89.1(A[0]) R91.1(A[0])
N467246: R89.2(B[0]) U6.17(SYNC)
N467382: C19.2(B[0]) L1.1(INA) U6.8(SW) U6.9(SW1) U6.21(SW2) U6.22(SW3)
N467394: C26.1(A[0]) R85.2(B[0]) R87.1(A[0]) U6.20(FB)
N467538: D2.K R90.2(B[0]) U6.19(PG)
N467590: C19.1(A[0]) U6.3(BST)
N467642: R83.1(A[0]) R86.2(B[0]) R11215.2(B[0]) U6.14(EN/UV)
N467702: R82.1(A[0]) U6.15(RT)
N467706: C25.1(A[0]) U6.16(TR/SS)
N467816: R84.1(A[0]) U6.1(BIAS)
N491349: R68.2(B[0]) R69.1(A[0]) U4.1(DIR1)
N491357: R63.2(B[0]) R64.1(A[0]) U4.2(DIR2)
N491365: R57.2(B[0]) R60.1(A[0]) U4.7(DIR3)
N491373: R54.2(B[0]) R55.1(A[0]) U4.8(DIR4)
N491495: C9.1(A[0]) Q1.1(G) R50.2(B[0]) R51.2(B[0])
N491535: Q1.3(D) R52.1(A[0])
N492804: R62.1(A[0]) U4.14(B1)
N492808: R61.1(A[0]) U4.13(B2)
N492954: R59.1(A[0]) U4.12(B3)
N492958: R56.1(A[0]) U4.11(B4)
N497909: R39.1(A[0]) U2.6(GPIO1)
N497917: R35.1(A[0]) U2.13(GPIO3)
N498169: R43.2(B[0]) U2.5(GPIO0)
N498265: C1L2.1(A[0]) R38.1(A[0]) U2.11(XTAL1) X1.3
N498655: R34.1(A[0]) U2.15(SDA)
N498659: R33.1(A[0]) U2.16(SCL)
N498979: R23.1(A[0]) R30.2(B[0]) U2.21(NRESET#)
N499135: R42.2(B[0]) U2.3(A1/SI)
N499143: R41.2(B[0]) U2.2(A0/CS#)
N499151: R40.2(B[0]) U2.7(I2C/SPI#)
N499223: R44.2(B[0]) U2.10(GPIO2)
N503686: R77.1(A[0]) U5.14(B1)
N503690: R76.1(A[0]) U5.13(B2)
N503750: R73.1(A[0]) U5.12(B3)
N503754: R71.1(A[0]) U5.11(B4)
N503920: R80.2(B[0]) R81.1(A[0]) U5.1(DIR1)
N503928: R78.1(A[0]) R79.2(B[0]) U5.2(DIR2)
N503936: R72.1(A[0]) R74.2(B[0]) U5.7(DIR3)
N503944: R66.2(B[0]) R67.1(A[0]) U5.8(DIR4)
N504114: R65.2(B[0]) U5.9(NOE)
N540535: R37.2(B[0]) U2.12(XTAL2)
N540567: C1L3.1(A[0]) R37.1(A[0]) R38.2(B[0]) X1.1
N16235938: R2610.2 R2612.1 U2604.7(CTRL)
N16235942: R2611.2 U2604.8(ENB)
N16236513: R10922.2 U2604.5(RF3)
N16236561: R150.1 R875.1 R10923.1
N16236568: R10922.1 R10923.2 R10924.1 R10925.2
N16236755: R876.2 R10924.2 U2605.1(INPUT)
N16239300: R10926.1 R10927.2 U2605.4(OUTPUT)
N16242234: C4462.2 L4001.1
N16242265: L4001.2 U2606.5(AI)
N16250980: C4477.1 C4478.1 C4479.1 R10930.1 U2606.2(VCC)
N16251320: C4480.1 R10931.1 U2606.6(PON)
N16252104: R10932.2 R10934.2 R10935.1 R10936.2
N16252502: R10935.2 U2607.1(INPUT)
N16252658: R10937.1 U2607.4(OUTPUT)
N16252725: R10936.1 R10938.1
N16253717: R10939.1 U2604.11(RF2)
N16254704: R10942.2(B[0]) U3.14(TXD_CPU)
N16272577: D1.K J4.12
N16281078: R10944.1 U7122.4(OUT)
N16284944: R11191.1 U7153.4(B)
N16284962: R11194.2 R11195.1 U7153.5(DIR)
N16326389: R874.2 U2604.2(RFC)
N16343792: D10114.A R10784.2(B[0])
N16343928: D10125.A R10798.2(B[0])
N16349804: R14.2(B[0]) R11217.1(A[0]) U28.26(ADDR0)
N16349842: R11.2(B[0]) R11216.1(A[0]) U28.10(ADDR1)
N16350507: R11196.1(A[0]) R11211.2(B[0]) U28.22(I/O[15])
N16350522: R11197.1(A[0]) R11212.2(B[0]) U28.21(I/O[14])
N16350529: R11198.1(A[0]) U28.20(I/O[13])
N16350649: R11199.1(A[0]) U28.19(I/O[12])
N16350656: R11200.1(A[0]) U28.16(I/O[11])
N16397474: R11213.2(B[0]) R11214.1(A[0]) U28.9(#INT)
N16399039: R2L2.2(B[0]) R2L6.2(B[0])
N16399647: R2L7.2(B[0]) U3A1.10(SCLK)
N16399661: R2L8.2(B[0]) U3A1.9(SDATA)
N16415904: R96.1(A[0]) U19.1(NOE) U19.2(INA)
N16428667: C3505.1 R19.2(B[0]) R11221.1(A[0])
N16428743: C4501.1 R11221.2(B[0]) R11222.1(A[0])
N16451486: R11224.2 R11227.1 U7154.7(CTRL)
N16451490: R11225.2 U7154.8(ENB)
N16451534: R11226.2 U7154.2(RFC)
N16451598: R11228.2 U7154.5(RF3)
N16452331: R11223.1 U7154.11(RF2)
N16454327: R11229.1 U7155.4(B)
N16454345: R11231.1 R11232.2 U7155.5(DIR)
N16509904: R150.2 R151.2

Pads without a net: J3 16 17; J4 13 50; U2 4; U3 1 2 6 8 12 15 16; U28 11; U7122 1

## Via types
v1: diameter 0.635, hole 0.254, TOP to BOTTOM, 22 vias
v2: diameter 0.559, hole 0.254, TOP to BOTTOM, 376 vias

## Routing (per net, layer and track width the routed paths; a pad name or vN(x,y) marks a point on that pad's centre or on a via; arc(x,y) is an arc through that point)
3.3VD_TIVA: length 86.3
  TOP w0.305: v1(55.31,29.67) 55.59,29.95 55.59,31.63 U3A1.1
  TOP w0.381: C2L11.2 54.81,29.16 v1(55.31,29.67) ; R31.1 v2(45.98,23.62) ; 17.94,33.54 17.94,32.29 ; R44.1 v2(49.39,9.32) ; TP5.1 15.73,42.06 15.72,42.05 R36.1 13.9,42.05 13.87,42.07 v2(13.15,42.07) ; R28.1 v2(40.37,23.5) ; R29.1 v2(41.77,23.62) ; R30.1 v2(44.58,23.62) ; R90.1 v2(30.78,4.91) ; R24.1 v2(47.38,23.62) ; R41.1 v2(42.41,9.32) ; R20.1 36.61,50.53 37.16,51.08 37.16,51.79 37.99,52.62 FB1.1 ; 42.39,12.55 U2.1 42.39,14.4 ; R43.1 v2(45.2,9.32) ; R42.1 v2(43.81,9.32) ; 3.95,33.39 J4.21 5.96,33.39 ; 5.96,31.48 J4.27 4.13,31.48 ; R40.1 v2(48,9.32) ; R2L6.1 v2(58.88,29.38)
  TOP w0.508: v2(30.78,4.91) v2(30.78,3.91)
  BOTTOM w0.203: v2(22.3,45.59) 22.3,45.64 22,45.95 U2604.9 ; 7.75,40.25 7.87,40.25 8.15,39.97 U7154.9 ; U28.12 28.09,44.42 27.97,44.3 ; U28.18 30.73,46.56 30.51,46.79 ; v2(31.14,40.94) 30.73,41.35 U28.4
  BOTTOM w0.305: v2(7.09,25.96) 7.95,25.96 8.39,26.4 U5.15 7.88,26.93 ; 16.33,52.78 U7155.1 ; 7,27.9 U5.16 7.67,27.43 ; v2(29.74,50.65) 29.74,49.92 29.87,49.8 29.87,48.2 29.62,47.96 C4500.1 ; 25.53,38.22 U7153.1 ; 50.12,43.18 U4.15 49.58,43.79 49.63,43.84
  BOTTOM w0.381: R66.1 v2(15.06,29.4) ; R74.1 11.24,35.07 10.88,35.43 v2(10.16,35.43) ; R11195.2 v2(20.35,38.13) ; R2.1 R3.1 36.03,47.18 v2(36.63,47.78) ; R11212.1 v2(33.52,50.52) 34.05,49.99 34.8,49.99 34.99,49.8 R11211.1 ; R68.1 v2(53.84,40.7) ; v2(17.91,54.25) 17.91,53.24 17.51,52.85 C4503.1 16.91,52.78 16.33,52.78 ; v2(48.49,48.06) 47.76,48.06 47.47,48.35 R58.1 ; C4500.1 28.99,47.36 29.18,47.17 30.12,47.17 30.51,46.79 ; 25.55,38.22 25.53,38.22 ; 25.55,38.22 C4495.1 ; 25.55,38.22 v2(26.26,38.22) ; R11.1 v2(25.07,42.6) 24.66,42.19 24.66,42.1 R11213.1 ; R11231.2 v1(11.81,52.78) ; R14.1 v2(36.95,42.06) ; R53.1 v2(42.92,42.2) ; R11233.1 v1(51.15,13.2) ; R5.1 v2(36.83,43.51) ; v2(9.14,21.73) 9.95,21.73 R75.1 ; R57.1 v2(46.73,35.81) ; R80.1 4.8,28.7 5.13,28.37 5.51,28.37 5.78,28.11 5.78,27.39 ; R79.1 8.39,34.75 8.01,35.13 7.8,35.13 v2(7.49,35.43) ; R10931.2 v2(34.33,55.04) ; 27.97,44.3 27.86,44.2 v2(27.76,44.2) 27.6,44.03 C4499.1 ; R10930.2 v2(36,55.04) ; C4498.1 31.51,40.58 v2(31.14,40.94) ; v2(7.04,41.27) 7.04,40.56 C4502.1 7.06,40.53 7.33,40.25 7.75,40.25 ; v2(22.3,45.59) 22.65,45.95 C2609.1 ; R63.1 v2(49.58,35.81) ; R54.1 v2(42.92,40.7) ; R70.1 v2(12.77,20.85) ; R2L9.1 v2(22.99,45.03)
  vias: v1(1.37,32.72) v2(1.37,31.7) v2(2.39,32.72) v2(2.39,31.7) v2(3.4,32.72) v2(3.4,31.7) v2(6.32,26.49) v2(7.06,27.1) v2(8.28,11.07) v2(8.28,10.06) v2(14.3,50.29) v2(15.32,50.27) v2(17.04,33.43) v2(17.04,32.41) v2(39.75,53.7) v2(40.54,53.7) v2(40.56,13.39) v2(40.58,12.45) v2(41.55,13.39) v2(41.57,12.45) v2(50.57,44.09) v2(51.59,44.09)
12V_IN: length 7.9
  TOP w0.381: TP7.1 18.2,12.21 C21.1 ; 3.91,37.2 J4.9 5.91,37.2 ; 3.9,38.47 J4.5 5.91,38.47
  vias: v1(1.32,38.13) v2(1.32,37.11) v2(1.32,36.09) v2(2.34,38.13) v2(2.34,37.11) v2(2.34,36.09) v2(3.43,37.74) v2(19.65,10.69) v2(19.65,9.67) v2(20.67,10.69) v2(20.67,9.67) v2(21.69,10.69) v2(21.69,9.67) v2(22.7,10.69) v2(22.7,9.67) v2(23.72,10.69) v2(23.72,9.67) v2(35.07,11.41) v2(36.01,11.6)
12V_REG_ENB: length 3.3
  BOTTOM w0.14: R11215.1 27.46,40.82 27.74,41.1 27.74,41.57 28.23,42.07 28.23,42.63 28.4,42.8 U28.8
GND: length 288.1
  TOP w0.229: 30.16,13.14 U6.10
  TOP w0.254: U6.18 30.66,7.89 v2(30.45,7.69)
  TOP w0.305: v2(57.59,33.01) 57.6,33 U3A1.5 ; U6.11 29.05,11.97 v2(28.6,12.42)
  TOP w0.381: J4.8 12.84,37.83 v2(13.18,38.18) ; v2(37.86,49.72) 37.96,49.62 C2.2 ; J4.26 v2(13.22,32.12) 12.59,31.48 J4.28 ; R18.2 R17.2 32.04,50.34 31.71,50.67 v2(30.64,50.67) R16.2 ; v2(26.23,9.44) 26.23,9.45 R82.2 ; J4.1 4.46,39.74 v2(3.94,40.26) 3.94,39.24 4.08,39.1 J4.3 ; X1.4 v2(52.79,14.14) ; C24.2 37.6,8.41 v2(37.57,8.38) ; J4.41 4.09,27.04 v2(3.69,26.64) 3.93,26.4 J4.43 ; U2.14 v2(48.89,18.04) ; TP1.1 v2(41.55,7.59) ; TP12.1 v2(55.63,24.97) ; J4.15 3.93,35.29 v2(3.69,35.53) ; 29.17,25.26 R47.1 v2(29.17,24.33) ; J4.22 v2(13.13,33.39) ; J4.36 10.75,28.94 v2(10.41,29.29) 10.7,29.58 J4.34 ; J4.31 3.93,30.21 v2(3.69,30.45) 4.09,30.85 J4.29 ; TP8.1 v2(9.78,10.9) ; v2(10.41,28.02) 10.75,27.67 J4.40 ; v2(10.41,28.02) 10.7,28.31 J4.38 ; v2(10.41,28.02) 10.41,27.21 10.58,27.04 J4.42 ; J4.46 13.37,25.77 v2(13.64,26.04) ; J4.35 3.93,28.94 v2(3.69,29.18) 4.09,29.58 J4.33 ; J4.30 13.18,30.85 v2(14.16,31.83) ; J4.45 4.09,25.77 v2(3.69,25.37) 3.93,25.13 J4.47 ; J4.17 4.09,34.66 v2(3.69,34.26) 3.93,34.02 J4.19 ; U3.9 37.55,29.98 v2(37.82,30.25) ; R91.2 v2(29.38,2.63) ; J4.14 v2(12.97,35.93) ; v2(2.89,35.02) C4461.2 2.89,34.26 ; 17.93,34.38 17.93,35.38 17.94,35.39 R11115.1 v2(17.18,35.39) ; v2(56.39,19.3) C1L2.2 55.3,19.3 ; J4.53 v2(7.57,31.8) ; J4.39 3.93,27.67 v2(3.69,27.91) 4.09,28.31 J4.37 ; U3.5 v2(32.47,30.15) ; J4.2 12.89,39.74 v2(13.18,39.45) 12.84,39.1 J4.4 ; v2(3.63,24.16) 3.97,24.5 J4.49 ; X1.2 v1(56.73,17.36) ; v2(12.99,26.64) 12.76,26.4 J4.44 ; J4.10 13.14,37.2 13.41,37.47 13.41,38.01 13.24,38.18 v2(13.18,38.18) ; R86.1 v2(25.57,5.67) ; J4.18 v2(13.14,34.66) ; v2(13.18,38.18) 12.89,38.47 J4.6 ; C2L11.1 v2(54.81,26.98) ; R85.1 v2(37.35,6.91)
  TOP w0.508: 27.48,12.48 C23.2 v2(27.48,13.4)
  TOP w0.635: J4.63 6.62,16.35 ; J4.63 7.6,15.38 ; J4.63 5.64,15.38 ; J4.63 6.62,14.4 ; 9.2,44.67 J4.55 ; J4.55 10.18,43.69 ; J4.55 10.18,45.64 ; J4.55 11.16,44.67 ; v2(42.57,43.92) 43.28,43.92 43.9,44.53 U3.19 ; J4.54 11.16,48.23 ; J4.54 10.18,49.2 ; J4.54 9.2,48.23 ; J4.54 10.18,47.25 ; J4.62 7.6,18.94 ; J4.62 6.62,17.96 ; J4.62 6.62,19.91 ; J4.62 5.64,18.94 ; J4.57 7.6,48.23 ; J4.57 6.62,47.25 ; J4.57 5.64,48.23 ; J4.57 6.62,49.2 ; J4.58 7.6,44.67 ; J4.58 6.62,45.64 ; J4.58 5.64,44.67 ; J4.58 6.62,43.69 ; J4.59 10.18,19.91 ; J4.59 9.2,18.94 ; J4.59 10.18,17.96 ; J4.59 11.16,18.94 ; J4.60 11.16,15.38 ; J4.60 9.2,15.38 ; J4.60 10.18,14.4 ; J4.60 10.18,16.35 ; U3.17 v2(46.44,43.94)
  GND w0.635: J4.55 11.16,44.67 ; J4.55 10.18,45.64 ; J4.55 9.2,44.67 ; J4.55 10.18,43.69 ; J4.62 6.62,19.91 ; J4.62 5.64,18.94 ; J4.62 7.6,18.94 ; J4.62 6.62,17.96 ; 6.62,47.25 J4.57 ; J4.57 7.6,48.23 ; J4.57 5.64,48.23 ; J4.57 6.62,49.2 ; 6.62,43.69 J4.58 ; J4.58 6.62,45.64 ; J4.58 7.6,44.67 ; J4.58 5.64,44.67 ; 5.64,15.38 J4.63 ; J4.63 6.62,14.4 ; J4.63 7.6,15.38 ; J4.63 6.62,16.35 ; 9.2,15.38 J4.60 ; J4.60 10.18,16.35 ; J4.60 10.18,14.4 ; J4.60 11.16,15.38 ; 9.2,48.23 J4.54 ; J4.54 11.16,48.23 ; J4.54 10.18,49.2 ; J4.54 10.18,47.25 ; 9.2,18.94 J4.59 ; J4.59 10.18,19.91 ; J4.59 10.18,17.96 ; J4.59 11.16,18.94
  SIG1 w0.635: 5.64,15.38 J4.63 ; J4.63 7.6,15.38 ; J4.63 6.62,14.4 ; J4.63 6.62,16.35 ; J4.54 10.18,49.2 ; J4.54 9.2,48.23 ; J4.54 10.18,47.25 ; J4.54 11.16,48.23 ; 10.18,14.4 J4.60 ; J4.60 11.16,15.38 ; J4.60 10.18,16.35 ; J4.60 9.2,15.38 ; J4.55 10.18,45.64 ; J4.55 9.2,44.67 ; J4.55 10.18,43.69 ; J4.55 11.16,44.67 ; 10.18,17.96 J4.59 ; J4.59 10.18,19.91 ; J4.59 9.2,18.94 ; J4.59 11.16,18.94 ; 6.62,47.25 J4.57 ; J4.57 5.64,48.23 ; J4.57 6.62,49.2 ; J4.57 7.6,48.23 ; 6.62,43.69 J4.58 ; J4.58 5.64,44.67 ; J4.58 6.62,45.64 ; J4.58 7.6,44.67 ; 6.62,17.96 J4.62 ; J4.62 6.62,19.91 ; J4.62 5.64,18.94 ; J4.62 7.6,18.94
  SIG2 w0.635: J4.57 7.6,48.23 ; J4.57 6.62,47.25 ; J4.57 5.64,48.23 ; J4.57 6.62,49.2 ; 5.64,44.67 J4.58 ; J4.58 6.62,43.69 ; J4.58 6.62,45.64 ; J4.58 7.6,44.67 ; 9.2,44.67 J4.55 ; J4.55 10.18,45.64 ; J4.55 10.18,43.69 ; J4.55 11.16,44.67 ; 10.18,47.25 J4.54 ; J4.54 11.16,48.23 ; J4.54 10.18,49.2 ; J4.54 9.2,48.23
  BOTTOM w0.203: v2(22,44.68) 21.26,45.41 U2604.10 ; U7154.6 8.7,38.42 8.42,38.14 ; U7154.12 9.7,40.43 9.91,40.64 v2(10.29,40.64) 10.41,40.51 10.41,40.13 10.25,39.97 U7154.1 ; v2(21.97,48.26) 21.26,47.54 U2604.6 ; v2(30.73,44.02) 30.33,44.42 U28.17 ; 9.88,38.07 9.7,38.26 U7154.4 ; 35.42,52.63 U2606.1 ; U7154.3 10.53,38.97 10.67,38.84 ; 16.94,51.92 16.58,52.28 U7155.2 ; U7154.10 8.7,40.55 8.56,40.69 ; U2604.4 20.26,47.56 19.96,47.85 19.42,47.85 v2(19.14,47.58) 19.35,47.37 19.35,47.32 19.73,46.95 U2604.3 ; v2(34.32,50.82) 34.32,50.85 34.88,51.42 U2606.4 ; U28.3 31.14,42.72 v2(30.73,43.13) ; U2604.12 20.26,45.36 19.99,45.1 19.57,45.1 v2(19.23,45.44) 19.73,45.95 U2604.1 ; U2605.2 v2(25.27,53.39) ; 34.53,27.65 J3.8
  BOTTOM w0.229: J3.3 33.73,32.28 34.01,32 ; J3.4 33.73,29.08 34.04,29.39 ; J3.15 36.13,32.04 ; J3.8 34.53,29.07 ; J3.18 36.53,29.76
  BOTTOM w0.254: C4495.2 25.45,37.36 25.15,37.36 24.79,37.72 U7153.2 ; U4.10 47.08,43.46 46.6,43.94 v2(46.44,43.94) ; U2605.3 25.77,52.89 v2(25.27,53.39) ; v2(35.18,53.24) 35.18,52.87 35.42,52.63 ; v2(42.52,53.62) U2607.3 U2607.2 U2607.5 43.63,51.38 v2(43.63,49.72)
  BOTTOM w0.305: v2(24.44,51.1) 24.96,51.1 25.27,51.41 U2605.5 ; v2(12.99,26.64) 12.7,26.93 U5.10
  BOTTOM w0.381: v2(25.04,39.33) C4496.2 24.28,39.33 ; v2(41.23,49.72) 41.18,49.66 Q1.2 ; R10927.1 26.78,52.87 v2(26.29,53.37) ; R11209.2 v2(29.27,38.4) ; D10114.K v2(9.79,3.51) ; v2(53.85,38.91) 53.47,39.29 R69.2 ; C4479.2 v1(38.94,55.04) ; R11208.2 v2(30.29,38.4) ; 19.17,37.05 R11192.2 v2(18.44,37.05) ; R11210.2 v2(28.26,38.4) ; C4478.2 v2(37.01,55.04) ; C4477.2 v2(37.97,55.02) ; D10125.K v2(12.58,3.51) ; R11194.1 v2(20.35,39.08) ; TP14.1 v2(53.81,35.19) ; v2(53.84,42.2) C13.2
  BOTTOM w0.635: J5.2 v2(13.93,44.32) ; J4.57 7.6,48.23 ; J4.57 6.62,49.2 ; J4.57 6.62,47.25 ; J4.57 5.64,48.23 ; 9.2,15.38 J4.60 ; J4.60 10.18,14.4 ; J4.60 10.18,16.35 ; J4.60 11.16,15.38 ; J4.59 10.18,20.04 ; J4.59 9.07,18.94 ; J4.59 10.18,17.83 ; J4.59 11.28,18.94 ; 10.18,43.69 J4.55 ; J4.55 9.2,44.67 ; J4.55 11.16,44.67 ; J4.55 10.18,45.64 ; 5.64,44.67 J4.58 ; J4.58 6.62,45.64 ; J4.58 7.6,44.67 ; J4.58 6.62,43.69 ; J4.62 7.6,18.94 ; J4.62 6.62,19.91 ; J4.62 6.62,17.96 ; J4.62 5.64,18.94 ; 10.18,47.25 J4.54 ; J4.54 10.18,49.2 ; J4.54 9.2,48.23 ; J4.54 11.16,48.23 ; 5.64,15.38 J4.63 ; J4.63 6.62,16.35 ; J4.63 6.62,14.4 ; J4.63 7.6,15.38 ; J5.3 v2(13.93,41.37)
  vias: v2(3.01,40.11) v2(6.6,35.05) v2(7.12,23.14) v2(8.13,41.02) v2(9.2,39.47) v2(9.4,35.05) v2(9.64,28.65) v2(10.29,38.33) v2(12.83,48.39) v2(12.76,45.38) v2(14.28,45.35) v2(14.68,47.56) v2(16.52,48.39) v2(16.74,28.52) v2(16.76,38.89) v2(17.35,23.83) v2(17.6,37.8) v2(17.73,29.51) v2(18,45.42) v2(17.98,40.84) v2(18.72,23.9) v2(18.97,39.04) v2(19.23,43.89) v2(19.39,48.53) v2(19.56,49.68) v2(20.03,16.79) v2(20.32,29.77) v2(20.76,46.45) v2(20.75,40.59) v2(20.75,35.56) v2(20.75,33.88) v2(21.25,16.76) v2(21.39,30.78) v2(21.84,53.19) v2(21.97,49.02) v2(22.02,35.84) v2(22.09,43.07) v2(22.48,33.78) v2(22.57,16.78) v2(22.91,53.26) v2(22.94,51.08) v2(23.37,55.02) v2(23.99,16.76) v2(24.18,45.24) v2(25.07,44.03) v2(25.53,36.58) v2(25.91,55.02) v2(26.56,17.54) v2(26.64,7.09) v2(27.23,50.77) v2(27.51,53.39) v2(28.45,55.02) v2(28.68,53.37) v2(28.83,50.67) v2(29.48,13.43) v2(29.84,53.44) v2(29.84,44.02) v2(29.84,43.13) v2(30.35,10.46) v2(30.35,9.7) v2(30.73,53.39) v2(30.99,55.02) v2(31.39,9.73) v2(31.47,10.49) v2(31.62,53.39) v2(31.62,44.02) v2(31.62,43.13) v2(32.11,13.56) v2(32.22,24.33) v2(32.28,38.46) v2(32.51,30.99) v2(32.85,12.77) v2(33.27,55.02) v2(33.65,24.33) v2(35.06,12.86) v2(35.46,50.47) v2(36.75,24.33) v2(36.95,40.63) v2(36.98,39.52) v2(37.41,50.37) v2(38.15,39.45) v2(38.64,24.33) v2(38.84,35.89) v2(39.52,24.31) v2(40.81,16.1) v2(40.89,9.32) v2(42.92,39.18) v2(46.45,50.24) v2(46.6,9.32) v2(46.91,55.07) v2(47.41,42.11) v2(47.41,40.84) v2(48.12,35.81) v2(48.33,41.45) v2(49.2,54.76) v2(49.2,50.24) v2(49.19,42.11) v2(49.19,40.84) v2(50.85,46.99) v2(51.26,35.79) v2(51.89,23.66) v2(52.93,13.21) v2(56.66,39.6)
V2P5: length 26.7
  TOP w0.381: 18.85,33.11 18.85,32.23 18.5,31.88 TP3026.1
  SIG1 w0.508: v2(14.53,54.67) 17.33,51.87 23.32,51.87 23.7,51.49 23.7,50.67 24.26,50.11 24.26,48.82 24.64,48.44 v2(24.64,47.65) v2(24.64,46.79)
  BOTTOM w0.305: 23.25,38.75 23.08,38.59 U7153.6 ; U7155.6 14.61,53.24 14.52,53.33
  BOTTOM w0.381: R2611.1 24.51,46.92 v2(24.64,46.79) ; R2610.1 24.35,47.93 v2(24.64,47.65) ; R11224.1 6.13,38.47 6.13,39.47 R11225.1 5.49,39.47 5.21,39.75 v2(5.21,40.89) ; v2(22.61,39.83) 22.86,39.83 C4496.1 23.35,38.86 23.25,38.75 ; 14.52,53.33 C4504.1 14.52,54.65 v2(14.53,54.67)
  vias: v2(19.63,35.15) v2(19.63,34.14) v2(19.63,33.12)
V5_A: length 34.4
  TOP w0.381: TP11.1 20.31,26.73 v2(20.31,25.55) ; C26.2 v2(32.3,4.91)
  TOP w0.508: R84.2 34.76,8.81 v2(35.54,8.03) ; FB4.1 v1(44.08,53.53)
  TOP w0.635: R87.2 v2(33.88,4.82)
  SIG1 w0.381: v1(44.08,53.53) 44.08,52.08 42.55,50.55 42.55,48.97 37.67,44.09 37.67,41.61 38.35,40.92 39.4,40.92 39.85,40.46 39.85,38.89 38.73,37.77 34.39,37.77 v2(33.83,38.33)
  BOTTOM w0.203: 33.33,33.62 J3.1 33.33,32.04
  BOTTOM w0.254: 33.33,29 J3.2
  BOTTOM w0.381: v2(33.83,38.33) 34.37,37.79 34.53,37.79 R94.1
  vias: v2(20.31,24.36) v2(20.31,23.16) v2(21.46,25.55) v2(21.46,24.36) v2(21.46,23.16) v2(22.73,25.63) v2(22.73,24.43) v2(22.73,23.16) v2(24,25.63) v2(24,24.43) v2(24,23.16) v2(23.97,21.89) v2(25.27,25.63) v2(25.27,24.43) v2(25.27,23.16) v2(25.29,21.89) v2(26.46,23.16) v2(26.46,21.89) v2(26.49,20.95) v2(27.3,22.53) v2(27.28,21.51) v2(31.55,35.51) v2(31.55,34.49) v2(31.9,27.69) v2(31.88,26.92) v2(32.56,35.51) v2(32.56,34.49) v2(32.74,27.71) v2(32.74,26.92)
ADT7481_D1_N: length 12.9
  TOP w0.127: U3A1.3 56.6,30.8 56.59,30.79 56.59,30.15 56.47,30.03 56.47,29.39 56.75,29.12 C2L12.2 v2(56.75,27.71)
  BOTTOM w0.127: v2(56.75,27.71) 56.44,27.41 56.44,26.88 54.02,24.45 52.01,24.45 51.68,24.79 51.68,25.55 50.98,26.25 Q2P1.2
ADT7481_D1_P: length 15.2
  TOP w0.127: U3A1.2 56.1,30.8 56.09,30.79 56.09,30.12 56.22,29.99 56.22,29.37 55.86,29.01 C2L12.1 v1(55.86,27.71)
  BOTTOM w0.127: Q2P1.3 52.67,28.65 52.88,28.44 Q2P1.1 52.88,26.24 51.96,25.32 51.96,24.9 52.15,24.71 53.91,24.71 56.19,26.98 56.19,27.38 v1(55.86,27.71)
ADT7481_D2_N: length 6.1
  TOP w0.127: U3A1.6 57.6,36.72 57.48,36.84 57.48,37.63 57.76,37.91 C2L13.2 57.76,38.9 57.49,39.18 57.49,40.49 58.22,41.22 Q3L1.2
ADT7481_D2_P: length 9.3
  TOP w0.127: Q3L1.3 56.52,43.64 56.31,43.43 Q3L1.1 56.31,41.22 57.23,40.3 57.23,39.26 56.87,38.9 C2L13.1 56.87,37.96 57.02,37.81 57.02,37.76 57.21,37.58 57.21,36.83 57.1,36.72 U3A1.7
ADT_THERM_N: length 3.4
  TOP w0.14: U3A1.4 57.1,30.79 57.09,30.79 57.09,29.87 57.86,29.11 R2L2.1
ALARM_IOEXP: length 5.9
  TOP w0.14: U3.31 28.66,46.22 28.42,46.46 26.37,46.46 25.48,47.35 25.48,47.62 24.98,48.12 R26.2
BUFFER_LTE_RESET: length 24.2
  TOP w0.14: R7.2 36.86,52.57 v2(36.88,52.6) ; U19.4 v1(16.14,54.61)
  SIG1 w0.142: v1(16.14,54.61) 18.28,52.48 36.16,52.48 36.28,52.6 v2(36.88,52.6)
DF_ CTS: length 19
  SIG1 w0.142: v2(47.9,38.58) 42.37,33.05 36.98,33.05 35.71,34.32 v2(35.71,34.98)
  BOTTOM w0.14: v2(35.71,34.98) 35.71,34.57 35.33,34.19 J3.11 ; U4.5 48.08,38.76 v2(47.9,38.58)
DF_ DCD: length 34.2
  SIG1 w0.142: v2(10.46,31.29) 9.93,31.83 9.93,32.49 10.19,32.74 10.77,32.74 11.3,32.21 11.3,31.97 15.38,27.88 17.16,27.88 22.27,32.99 33.46,32.99 34.5,34.04 34.5,34.22 v2(34.93,34.65)
  BOTTOM w0.127: 34.93,33.4 J3.9
  BOTTOM w0.14: U5.6 10.39,31.22 v2(10.46,31.29) ; v2(34.93,34.65) 34.93,33.4
DF_ DSR: length 32.8
  SIG1 w0.142: v2(9.3,31.39) 10.32,30.37 11.7,30.37 15.07,27 17.46,27 19.57,29.11 28.8,29.11 31.93,25.98 v2(34.34,25.98)
  BOTTOM w0.14: v2(34.34,25.98) 34.37,26.01 34.52,26.01 34.93,26.42 J3.10 ; U5.4 9.39,31.27 9.3,31.37 v2(9.3,31.39)
DF_ DTR: length 39.2
  SIG1 w0.142: v2(35.89,26.97) 36.53,26.34 36.53,25.6 35.97,25.04 32.31,25.04 28.75,28.6 19.67,28.6 17.72,26.65 14.87,26.65 11.6,29.92 9.93,29.92 8.69,31.16 8.69,32 8.9,32.21 v2(9.37,32.21)
  BOTTOM w0.14: J3.14 35.73,27.11 35.87,26.97 v2(35.89,26.97) ; v2(9.37,32.21) 9.12,32.21 8.74,31.83 8.74,31.14 8.89,30.98 U5.3
DF_ RTS: length 16
  SIG1 w0.142: v2(46.96,38.58) 42.34,33.96 38.38,33.96 37.87,34.47 v2(36.5,34.47)
  BOTTOM w0.14: v2(36.5,34.47) 36.12,34.47 35.73,34.08 J3.13 ; U4.6 47.58,39.2 v2(46.96,38.58)
DF_RI: length 36.6
  SIG1 w0.142: v2(10.49,32.18) 15.13,27.54 17.3,27.54 21.32,31.56 27.22,31.56 30.15,28.63 32.79,28.63 33.3,28.12 33.3,26.87 33.63,26.54 35.46,26.54 v2(35.94,26.06)
  BOTTOM w0.14: U5.5 9.89,31.59 v2(10.49,32.18) ; v2(35.94,26.06) 35.51,26.49 35.51,26.51 35.33,26.7 J3.12
DF_S_RX: length 20.6
  SIG1 w0.142: v2(34.54,35.38) 35.15,35.38 35.38,35.61 37.41,35.61 38.23,34.8 41.78,34.8 46.25,39.27 48.18,39.27 v2(48.82,38.63)
  BOTTOM w0.14: J3.7 34.53,34.23 34.26,34.49 34.26,35.1 v2(34.54,35.38) ; U4.4 48.58,38.87 v2(48.82,38.63)
DF_S_TX: length 23.6
  SIG1 w0.142: v2(49.86,38.71) 48.16,37.01 47.07,37.01 37.95,27.89 34.7,27.89 v2(33.92,27.11)
  BOTTOM w0.127: 33.92,27.31 33.92,27.5 34.13,27.71 J3.6
  BOTTOM w0.14: U4.3 49.08,39.19 49.56,38.71 v2(49.86,38.71) ; v2(33.92,27.11) 33.92,27.31
GPS_IRIDUM_ANT: length 5.8
  BOTTOM w0.356: J4.56 12.21,46.45 12.23,46.47 C4N1.2 13.58,46.47 13.61,46.45 R15.2
GPS_LNA_IN: length 2
  BOTTOM w0.356: R10926.2 R10928.2 C4462.1
GPS_LNA_OUT: length 2
  BOTTOM w0.229: 35.83,51.42 U2606.3
  BOTTOM w0.356: R10932.1 37.4,51.43 R10933.2 36.42,51.42 35.83,51.42
INIT_SURVEY_SEL: length 28.2
  TOP w0.14: R10943.1 v2(27.54,24.43)
  SIG2 w0.142: v2(26.24,47.47) 27.05,46.66 27.05,43.33 27.54,42.85 v2(27.54,24.43)
  BOTTOM w0.14: U28.15 28.7,46 27.65,47.05 26.66,47.05 v2(26.24,47.47)
IO_RESET: length 8.6
  BOTTOM w0.14: R4.1 37.39,46.84 37.19,47.04 37.19,48.03 36.86,48.36 36.4,48.36 35.61,47.57 35.31,47.57 35.08,47.35 R3.2 34.44,46.84 34.04,46.43 34.04,45.47 33.4,44.83 U28.23
IOEXP_SCL: length 6.5
  BOTTOM w0.14: U28.25 33.78,44.02 34.29,43.51 R5.2 35.08,44.02 35.33,44.27 37.55,44.27 37.82,44 R1.2
IOEXP_SDA: length 6.6
  BOTTOM w0.14: R6.2 37.82,44.9 37.66,44.74 35.22,44.74 35.08,44.88 R2.2 34.44,45.36 33.5,44.42 U28.24
IRIDIUM_3.3VD: length 22.4
  TOP w0.381: TP10.1 37.69,25.78 37.31,26.15 C10.1 v2(36.75,27) v2(37.76,27)
  BOTTOM w0.254: 36.93,29.11 J3.20 36.93,27.19 v2(36.75,27)
  BOTTOM w0.508: 38,29.08 41.67,32.76 R51.1
